# Altium PCB 7-Segment_v2_PCB.PcbDoc
Units mm, origin at the board's own origin, x right, y up, seen from the top; angles counter-clockwise.
Board outline 22.5 x 38.5 mm, 2 copper layers (Top Layer, Bottom Layer), stack 1.571 mm thick; 35 components, 42 nets, 106 pads, 21 vias.
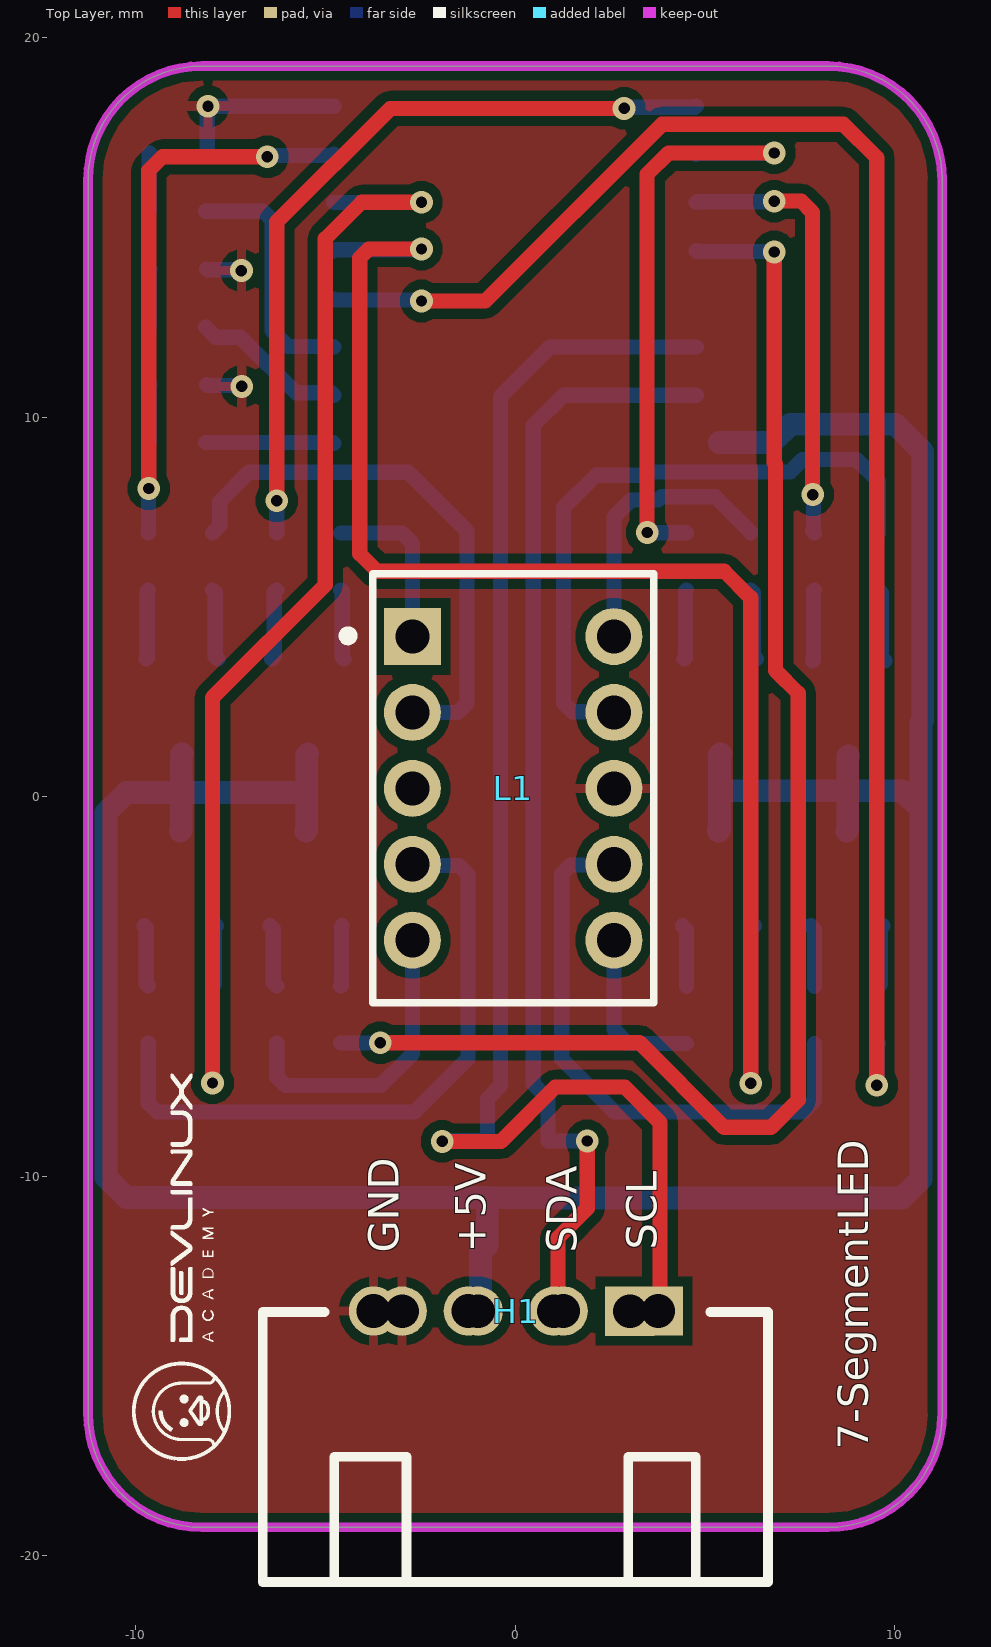
[diagram p0: Top Layer view]
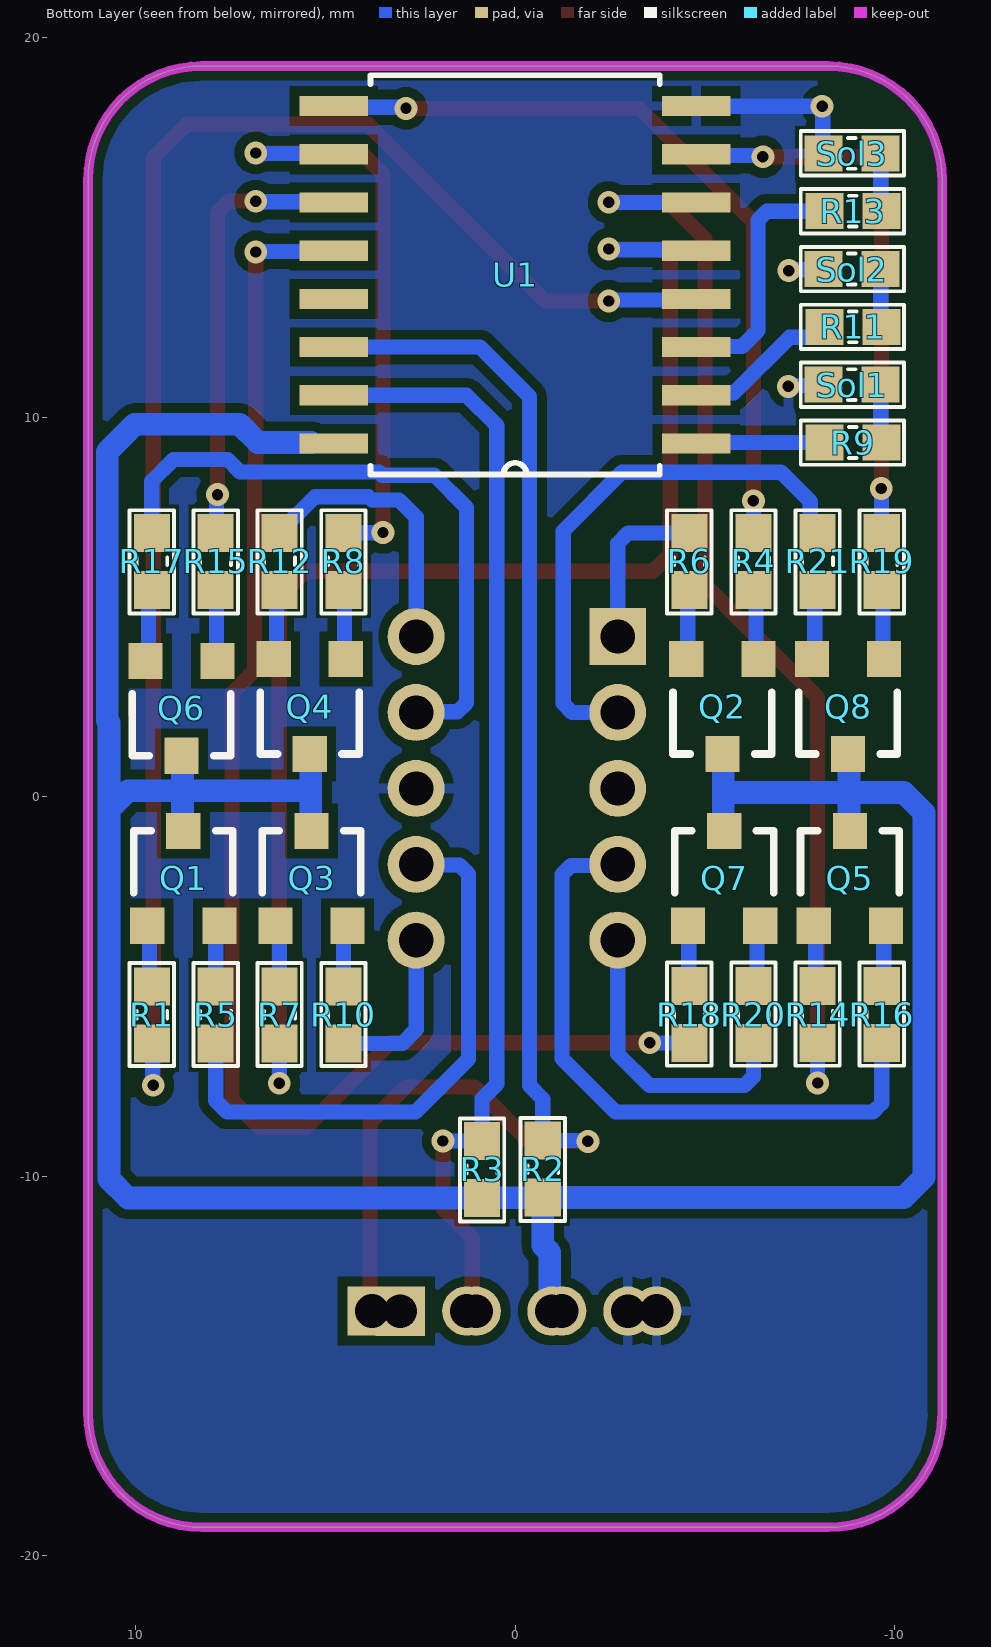
[diagram p1: Bottom Layer view, seen from below]
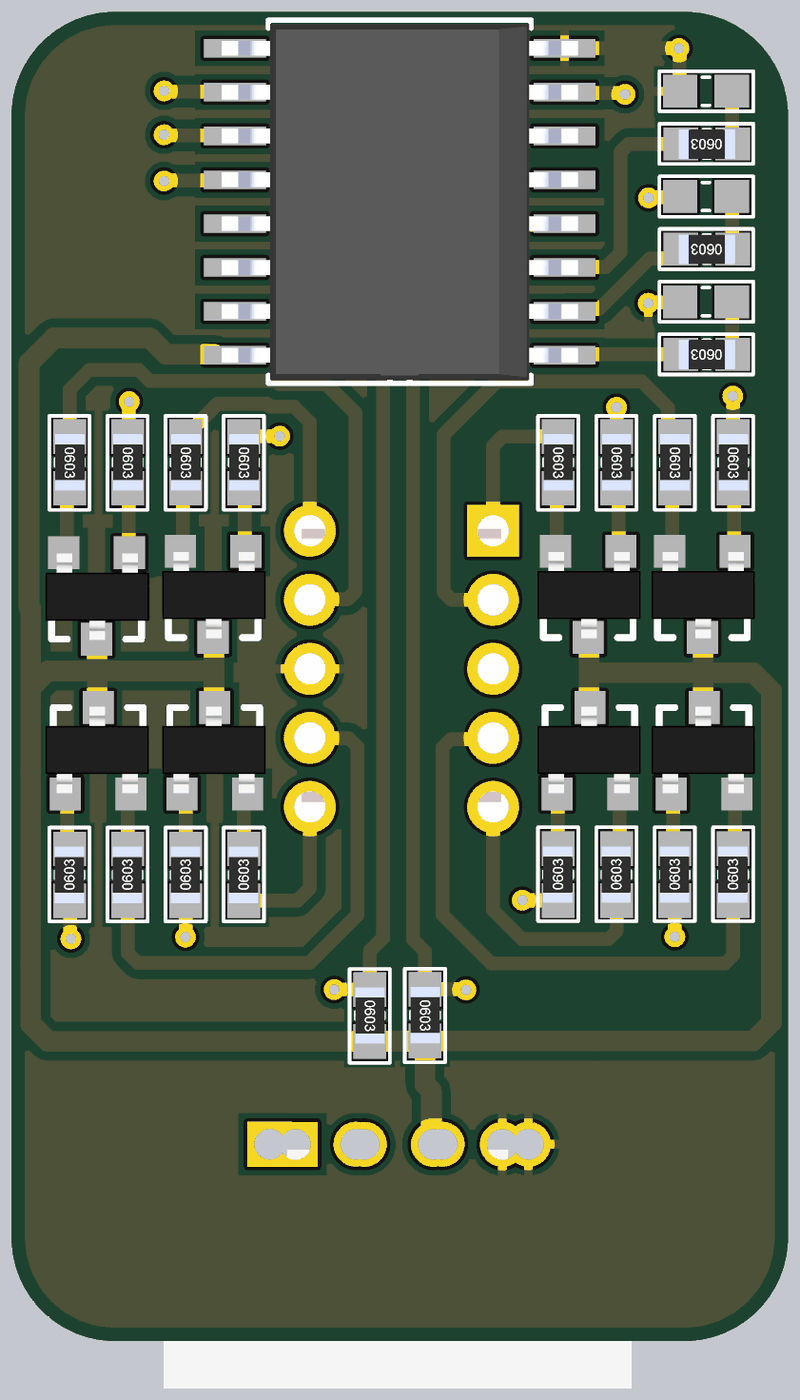
[diagram p2: 3D render of the assembled board from below, using the file's embedded part models]

## Layer stack, top to bottom
Top Solder: solder mask 0.0102, Solder Resist, Dk 3.5
Top Layer: signal copper 0.0356
Dielectric 1: dielectric 1.5, FR-4, Dk 4.8
Bottom Layer: signal copper 0.0356
Bottom Solder: solder mask 0.0102, Solder Resist, Dk 3.5

## Board outline
-11.25,-16.25 -11.25,16.25 cw(c-8.25,16.25) -8.25,19.25 8.25,19.25 cw(c8.25,16.25) 11.25,16.25 11.25,-16.25 cw(c8.25,-16.25) 8.25,-19.25 -8.25,-19.25 cw(c-8.25,-16.25)

## Design rules (kind name [scope] priority, off if disabled: settings)
Clearance [All] p1: gap=0.254 ignorepadtopadclearanceinfootprint=FALSE except(0: Arc-Hole Track-Hole SMDPad-Hole THPad-Hole Via-Hole Fill-Hole Poly-Hole Region-Hole Text-Hole)
PolygonConnect [All] p1: connectstyle=Relief reliefconductorwidth=0.254 reliefentries=4 polygonreliefangle="90 Angle" airgapwidth=0.254
RoomDefinition 7-Segment_v2_SCH [InComponentClass('7-Segment_v2_SCH')] p1: confinementstyle=ConfineIn formatcopy=TRUE lockcomponents=FALSE outline 77.183,-28.096 261.714,-28.096 261.714,-9.935 77.183,-9.935
RoutingVias [All] p1: holewidth=0.4 width=0.8 viastyle="Through Hole" minholewidth=0.3 minwidth=0.6 maxholewidth=0.5 maxwidth=1
SolderMaskExpansion [All] p1: expansion=0.102 istentingtop=FALSE
Width [All] p1: maxlimit=0.6 minlimit=0.254 preferedwidth=0.4
30 further rules are at their usual default settings.

## Components (designator, comment, footprint, x,y, rotation, side; value= is the part's Value field where it differs from the comment)
H1 "Header 4P 2.54 + 2.0 Duc Cong" "Header 4P DC 2.54 + 2.0" 3.745,-13.575 r270 top
L1 "LED 7 Thanh" "LED 7x1 0.28" -0.05,0.22 r0 top
Q1 "2N3906" SOT23 8.74,-2.15 r180 bottom
Q2 "2N3906" SOT23 -5.462,2.376 r0 bottom
Q3 "2N3906" SOT23 5.361,-2.15 r180 bottom
Q4 "2N3906" SOT23 5.409,2.376 r0 bottom
Q5 "2N3906" SOT23 -8.82,-2.15 r180 bottom
Q6 "2N3906" SOT23 8.788,2.33 r0 bottom
Q7 "2N3906" SOT23 -5.51,-2.15 r180 bottom
Q8 "2N3906" SOT23 -8.772,2.376 r0 bottom
R1 "10k" "tro smd 0603" 9.57,-5.748 r90 bottom
R2 "4.7k" "tro smd 0603" -0.73,-9.81 r270 bottom
R3 "4.7k" "tro smd 0603" 0.87,-9.82 r270 bottom
R4 "10k" "tro smd 0603" -6.28,6.2 r270 bottom
R5 "220R" "tro smd 0603" 7.887,-5.748 r90 bottom
R6 "220R" "tro smd 0603" -4.59,6.2 r270 bottom
R7 "10k" "tro smd 0603" 6.203,-5.748 r90 bottom
R8 "10k" "tro smd 0603" 4.52,6.2 r270 bottom
R9 "1k" "tro smd 0603" -8.899,9.33 r0 bottom
R10 "220R" "tro smd 0603" 4.52,-5.748 r90 bottom
R11 "1k" "tro smd 0603" -8.899,12.378 r0 bottom
R12 "220R" "tro smd 0603" 6.203,6.2 r270 bottom
R13 "1k" "tro smd 0603" -8.899,15.426 r0 bottom
R14 "10k" "tro smd 0603" -7.971,-5.74 r90 bottom
R15 "10k" "tro smd 0603" 7.887,6.2 r270 bottom
R16 "220R" "tro smd 0603" -9.661,-5.74 r90 bottom
R17 "220R" "tro smd 0603" 9.57,6.2 r270 bottom
R18 "10k" "tro smd 0603" -4.59,-5.74 r90 bottom
R19 "10k" "tro smd 0603" -9.661,6.2 r270 bottom
R20 "220R" "tro smd 0603" -6.28,-5.74 r90 bottom
R21 "220R" "tro smd 0603" -7.971,6.2 r270 bottom
Sol1 "0603" "Solder 0603" -8.874,10.854 r180 bottom
Sol2 "0603" "Solder 0603" -8.874,13.902 r180 bottom
Sol3 "0603" "Solder 0603" -8.874,16.95 r180 bottom
U1 "PCF8574AT" SOIC127P1032X265-16N 0,13.75 r0 bottom

## Footprints (in the part's own frame and the unit in brackets; to place one, negate y for a bottom-side part, rotate by r counter-clockwise, add the part's x,y. Pads: shape width x height; smd on the part's side, far side on the other; paste and mask are expansions set on the pad)
"Header 4P DC 2.54 + 2.0" [mm]
  rect 1.3x1.3 hole 0.889: 1(-0.025,0.025) 1(-0.022,-0.719)
  round 1.3 hole 0.889: 2(-0.025,-2.475) 2(-0.022,-2.719) 3(-0.025,-4.975) 3(-0.022,-4.719) 4(-0.025,-7.475) 4(-0.022,-6.718)
  silkscreen extent 0,-10.39 7.11,2.92, body extent 0.13,-10.48 7.06,3.11, height 7.38
"LED 7x1 0.28" [mm]
  rect 1.5x1.5 hole 0.9: 1(-2.655,4)
  round 1.5 hole 0.9: 2(-2.655,2) 3(-2.655,0) 4(-2.655,-2) 5(-2.655,-4) 6(2.655,-4) 7(2.655,-2) 8(2.655,0) 9(2.655,2) 10(2.655,4)
  silkscreen extent -4.47,-5.65 3.7,5.65, body extent -3.9,-4.95 3.9,5.15, height 8.04
SOIC127P1032X265-16N [mil]
  rect 71x21 smd: 1(-188,175) 2(-188,125) 3(-188,75) 4(-188,25) 5(-188,-25) 6(-188,-75) 7(-188,-125) 8(-188,-175) 9(188,-175) 10(188,-125) 11(188,-75) 12(188,-25) 13(188,25) 14(188,75) 15(188,125) 16(188,175)
  silkscreen extent -150,-207 150,207, body extent -203,-203 203,203, height 104
"Solder 0603" [mm] "Chip Capacitor, 2-Leads, Body 1,60x0,80mm, IPC Medium Density"
  rect 1x0.95 smd mask+0.076: 1(-0.75,0) 2(0.75,0)
  silkscreen extent -1.35,-0.58 1.37,0.58
SOT23 [mm] "SOT23"
  rect 0.9x0.95 smd: 1(-0.95,-1.25) 2(0,1.25)
  rect 0.9x0.95 smd mask+0: 3(0.95,-1.25)
  silkscreen extent -1.3,-0.38 1.3,1.25, body extent -1.52,-1.23 1.48,1.27, height 1.06
"tro smd 0603" [mm] "Chip Capacitor, 2-Leads, Body 1,60x0,80mm, IPC Medium Density"
  rect 1x0.95 smd mask+0.076: 1(-0.75,0) 2(0.75,0)
  silkscreen extent -1.35,-0.58 1.37,0.58, body extent -0.82,-0.42 0.82,0.43, height 0.44

## Part data
H1: "Cắm", Chung_Loai=Cắm, Don_Vi=Con, Ma_Hang=MH001310, Ten_Linh_Kien="Header 4P XH2.54-4P Đực Cong"
L1: library part "LED 7x1 0.28 Katot", "Dán", Chung_Loai=Dán, Don_Vi=Con, Ma_Hang=MH009707, Ten_Linh_Kien="Led 7 0.28 1 Số Katot Sáng Đỏ"
Q1 Q2 Q3 Q4 Q5 Q6 Q7 Q8: library part "Trans A1015 BA SMD", "PNP 600mW, ECB"
R1 R2 R3 R4 R7 R8 R14 R15 R18 R19: library part "Tro 0603 1% 10k", "Dán", Chung_Loai=Dán, Don_Vi=Con, Ma_Hang=MH006333, So_Chan=2, Ten_Linh_Kien="Trở 0603 1% 10k"
R5 R6 R10 R12 R16 R17 R20 R21: library part "Tro 0603 5% 220R", "Dán", Chung_Loai=Dán, Don_Vi=Con, Ma_Hang=MH006322, So_Chan=2, Ten_Linh_Kien="Trở 0603 5% 220R"
R9 R11 R13: library part "Tro 0603 1% 1k", "Dán", Chung_Loai=Dán, Don_Vi=Con, Ma_Hang=MH006334, So_Chan=2, Ten_Linh_Kien="Trở 0603 1% 1k"
Sol1 Sol2 Sol3: library part "Solder 0603", "Dán", Chung_Loai=Dán, Don_Vi=Con, So_Chan=2, Ten_Linh_Kien="Chân hàn 0603"
U1: "IÂ²C Bus IC Operating temperature: -40...+85 Â°C Power supply: 2.5...6 V Package: SO-16W", Package="SOIC-16 NXP Semiconductors", Check_prices=https://www.snapeda.com/parts/PCF8574AT/NXP+Semiconductors/view-part/?ref=eda, MF="NXP USA", MP=PCF8574AT, SnapEDA_Link=https://www.snapeda.com/parts/PCF8574AT/NXP+Semiconductors/view-part/?ref=snap

## Via types
v1: diameter 0.6, hole 0.3, Top Layer to Bottom Layer, 21 vias

## Nets (pads, with @x,y where several pads share a name; then routed paths per layer and width w, separated by ;. In a path a pad name is that pad's centre, name@x,y a point inside that pad or via, vN(x,y) a via of type N, cw(c..) or ccw(c..) an arc to the next point about the centre after c; other vN are vias at no path point)
+5: H1.3 Q1.2 Q2.2 Q3.2 Q4.2 Q5.2 Q6.2 Q7.2 Q8.2 R2.2 R3.2 U1.16 | length 78.8
  Bottom Layer w0.6: Q5.2 -8.796,-0.876 -8.796,0.113 ; Q8.2 -8.796,1.102 -8.796,0.113 ; Q7.2 -5.486,-0.876 -5.486,0.113 ; Q2.2 -5.486,1.102 -5.486,0.113 ; H1.3@-0.974,-13.553 -0.913,-13.493 -0.913,-12.003 -0.73,-11.82 R2.2 ; Q3.2 5.385,-0.876 5.385,0.113 ; U1.16@5.377,9.33 6.77,9.33 7.25,9.81 10.02,9.81 10.742,9.088 10.742,1.998 10.694,1.951 10.694,-0.335 ; Q4.2 5.385,1.102 5.385,0.113 ; Q1.2 8.764,-0.876 8.764,0.16 ; Q6.2 8.764,1.056 8.764,0.16 ; -8.796,0.113 -10.239,0.113 -10.774,-0.423 -10.774,-10.025 -10.239,-10.56 R2.2 ; -8.796,0.113 -5.486,0.113 ; R2.2 -0.725,-10.565 0.865,-10.565 R3.2 10.199,-10.57 10.694,-10.075 10.694,-0.335 ; 5.385,0.113 5.432,0.16 8.764,0.16 ; 8.764,0.16 10.199,0.16 10.694,-0.335
A: L1.7 R5.1 | length 15.2
  Bottom Layer w0.4: L1.7 2.586,-1.799 1.464,-1.799 1.23,-2.033 1.23,-6.91 2.624,-8.304 7.588,-8.304 7.887,-8.006 R5.1
B: L1.6 R10.1 | length 4.4
  Bottom Layer w0.4: L1.6 2.605,-6.135 2.968,-6.498 R10.1
C: L1.4 R16.1 | length 17.1
  Bottom Layer w0.4: R16.1 -9.661,-8.076 -9.427,-8.31 -2.65,-8.31 -1.24,-6.9 -1.24,-2.05 -1.474,-1.816 -2.669,-1.816 L1.4
D: L1.2 R21.1 | length 14.5
  Bottom Layer w0.4: R21.1 -7.779,7.142 -7.779,7.781 -7.01,8.55 -2.82,8.55 -1.27,7 -1.27,2.454 -1.504,2.22 L1.2
E: L1.1 R6.1 | length 4.5
  Bottom Layer w0.4: R6.1 -2.98,6.95 -2.705,6.675 L1.1
F: L1.10 R12.1 | length 7.4
  Bottom Layer w0.4: L1.10 2.605,7.365 3.056,7.816 3.769,7.816 3.857,7.904 5.274,7.904 6.203,6.975 R12.1
G: L1.9 R17.1 | length 17
  Bottom Layer w0.4: L1.9 2.586,2.239 1.514,2.239 1.28,2.473 1.28,7.62 2.13,8.47 3.498,8.47 3.586,8.558 7.248,8.558 7.57,8.88 9,8.88 9.57,8.31 R17.1
GND: H1.4 L1.8 Sol1.1 Sol2.1 Sol3.1 U1.8 | length 6.4
  Bottom Layer w0.4: Sol1.1 -8.102,10.832 -7.222,10.832 v1(-7.2,10.81) ; Sol2.1 -8.103,13.881 -7.231,13.881 v1(-7.21,13.86) ; Sol3.1 -8.107,16.967 -8.107,18.173 -8.087,18.192 -4.778,18.192 U1.8
  other v1: -8.09,18.19
H: L1.5 R20.1 | length 7.9
  Bottom Layer w0.4: R20.1 -6.28,-7.376 -6.046,-7.61 -3.54,-7.61 -2.705,-6.775 L1.5
NetQ1_1: Q1.1 R1.2 | length 1.6
  Bottom Layer w0.4: R1.2 9.63,-4.938 9.63,-3.46 Q1.1
NetQ1_3: Q1.3 R5.2 | length 1.6
  Bottom Layer w0.4: Q1.3 7.887,-3.497 R5.2
NetQ2_1: Q2.1 R4.2 | length 1.9
  Bottom Layer w0.4: Q2.1 -6.346,3.692 -6.346,5.384 R4.2
NetQ2_3: Q2.3 R6.2 | length 1.9
  Bottom Layer w0.4: R6.2 -4.551,5.411 -4.551,3.665 Q2.3
NetQ3_1: Q3.1 R7.2 | length 1.6
  Bottom Layer w0.4: R7.2 6.203,-3.508 Q3.1
NetQ3_3: Q3.3 R10.2 | length 1.6
  Bottom Layer w0.4: Q3.3 4.52,-3.509 R10.2
NetQ4_1: Q4.1 R8.2 | length 1.8
  Bottom Layer w0.4: Q4.1 4.49,3.656 4.49,5.419 R8.2
NetQ4_3: Q4.3 R12.2 | length 1.9
  Bottom Layer w0.4: R12.2 6.281,5.372 6.281,3.704 Q4.3
NetQ5_1: Q5.1 R14.2 | length 1.6
  Bottom Layer w0.4: R14.2 -7.92,-4.94 -7.92,-3.45 Q5.1
NetQ5_3: Q5.3 R16.2 | length 1.6
  Bottom Layer w0.4: Q5.3 -9.716,-3.454 -9.716,-4.936 R16.2
NetQ6_1: Q6.1 R15.2 | length 1.9
  Bottom Layer w0.4: Q6.1 7.862,3.604 7.862,5.426 R15.2
NetQ6_3: Q6.3 R17.2 | length 1.9
  Bottom Layer w0.4: R17.2 9.654,5.366 9.654,3.664 Q6.3
NetQ7_1: Q7.1 R18.2 | length 1.6
  Bottom Layer w0.4: R18.2 -4.575,-4.975 -4.575,-3.415 Q7.1
NetQ7_3: Q7.3 R20.2 | length 1.7
  Bottom Layer w0.4: Q7.3 -6.37,-3.49 -6.37,-4.9 R20.2
NetQ8_1: Q8.1 R19.2 | length 1.8
  Bottom Layer w0.4: Q8.1 -9.692,3.656 -9.692,5.419 R19.2
NetQ8_3: Q8.3 R21.2 | length 1.9
  Bottom Layer w0.4: R21.2 -7.896,5.376 -7.896,3.7 Q8.3
NetR9_1: R9.1 Sol1.2 | length 1.5
  Bottom Layer w0.4: R9.1 -9.636,9.343 -9.636,10.841 Sol1.2
NetR9_2: R9.2 U1.1 | length 3.4
  Bottom Layer w0.4: R9.2 -8.147,9.328 -4.798,9.328 U1.1
NetR11_1: R11.1 Sol2.2 | length 1.5
  Bottom Layer w0.4: R11.1 -9.636,12.391 -9.636,13.889 Sol2.2
NetR11_2: R11.2 U1.2 | length 4.1
  Bottom Layer w0.4: R11.2 -7.874,12.103 -7.233,12.103 -5.772,10.642 -4.842,10.642 U1.2
NetR13_1: R13.1 Sol3.2 | length 1.5
  Bottom Layer w0.4: R13.1 -9.636,15.439 -9.636,16.937 Sol3.2
NetR13_2: R13.2 U1.3 | length 6.6
  Bottom Layer w0.4: R13.2 -6.634,15.426 -6.4,15.192 -6.4,12.28 -5.979,11.859 -4.789,11.859 U1.3
P0: R1.1 U1.4 | length 42.2
  Top Layer w0.4: v1(-2.466,13.06) -0.785,13.06 3.869,17.714 8.652,17.714 9.53,16.836 v1(9.53,-7.6)
  Bottom Layer w0.4: U1.4 -4.748,13.087 -2.494,13.087 v1(-2.466,13.06) ; v1(9.53,-7.6) 9.55,-7.58 9.55,-6.518 R1.1
P1: R7.1 U1.5 | length 36.6
  Top Layer w0.4: v1@-2.4,14.43 -3.856,14.43 -4.09,14.196 -4.09,6.4 -3.63,5.94 5.51,5.94 6.21,5.24 v1(6.21,-7.55)
  Bottom Layer w0.4: U1.5 -4.753,14.407 -2.422,14.407 v1@-2.4,14.43 ; R7.1 6.207,-6.502 6.207,-7.547 v1(6.21,-7.55)
  other v1: -2.466,14.43
P2: R14.1 U1.6 | length 29.8
  Top Layer w0.4: v1(-7.971,-7.541) -7.971,2.609 -5,5.58 -5,14.7 -4.04,15.66 v1@-2.437,15.66
  Bottom Layer w0.4: v1(-7.971,-7.541) R14.1 ; U1.6 -4.773,15.657 -2.44,15.657 v1@-2.437,15.66
  other v1: -2.466,15.66
P3: R19.1 U1.7 | length 14.6
  Top Layer w0.4: v1(-9.65,8.12) -9.65,16.5 -9.29,16.86 v1(-6.53,16.86)
  Bottom Layer w0.4: R19.1 -9.656,6.956 -9.656,8.114 v1(-9.65,8.12) ; v1(-6.53,16.86) -6.498,16.892 -4.808,16.892 U1.7
P4: R4.1 U1.9 | length 20.5
  Top Layer w0.4: v1(-6.28,7.796) -6.28,15.14 -3.286,18.134 v1(2.874,18.134)
  Bottom Layer w0.4: R4.1 v1@-6.28,7.796 ; v1(2.874,18.134) 2.904,18.164 4.745,18.164 U1.9
P5: R8.1 U1.10 | length 16.3
  Top Layer w0.4: v1(3.48,6.96) 3.48,16.4 4.04,16.96 v1@6.89,16.96
  Bottom Layer w0.4: v1(3.48,6.96) 3.485,6.955 4.515,6.955 R8.1 ; U1.10 4.793,16.942 6.872,16.942 v1@6.89,16.96
  other v1: 6.83,16.96
P6: R15.1 U1.11 | length 11.6
  Top Layer w0.4: v1@6.95,15.69 7.54,15.69 7.84,15.39 v1(7.84,7.96)
  Bottom Layer w0.4: U1.11 4.793,15.672 v1@6.83,15.672 ; v1(7.84,7.96) 7.863,7.937 7.863,7.02 7.84,6.997 R15.1
  other v1: 6.83,15.69
P7: R18.1 U1.12 | length 37.9
  Top Layer w0.4: v1(-3.55,-6.48) 3.275,-6.48 5.505,-8.71 6.74,-8.71 7.46,-7.99 7.46,2.727 6.864,3.323 6.864,8.773 6.83,8.807 v1(6.83,14.35)
  Bottom Layer w0.4: R18.1 -4.585,-6.485 -3.555,-6.485 v1(-3.55,-6.48) ; U1.12 4.793,14.367 6.812,14.367 v1(6.83,14.35)
SCL: H1.1 R2.1 U1.14 | length 38.3
  Top Layer w0.4: v1(-1.92,-9.08) -0.37,-9.08 1.06,-7.65 2.89,-7.65 3.82,-8.58 3.82,-13.5 H1.1@3.77,-13.55
  Bottom Layer w0.4: v1(-1.92,-9.08) -1.9,-9.06 R2.1 -0.73,-7.96 -0.38,-7.61 -0.38,10.54 0.925,11.845 U1.14
SDA: H1.2 R3.1 U1.15 | length 29.5
  Top Layer w0.4: H1.2@1.27,-13.55 1.13,-13.41 1.13,-11.62 1.9,-10.85 v1(1.9,-9.07)
  Bottom Layer w0.4: v1(1.9,-9.07) R3.1 0.87,-7.96 0.48,-7.57 0.48,9.78 1.275,10.575 U1.15
pads on no net: L1.3 U1.13

## Polygon pours and split planes (outlines as drawn)
GND on Bottom Layer "NONET_L-01_P-001" (solid, remove dead copper, pour order 0): -11.25,19.25 11.25,19.25 11.25,-19.25 -11.25,-19.25
GND on Top Layer "NONET_L-01_P-001" (solid, remove dead copper, pour order 1): -11.25,-19.25 11.25,-19.25 11.25,19.25 -11.25,19.25

## Keep-outs
Keep-Out Layer:
  the board outline again, w0.254

## Silkscreen, mask and mechanical layers (free items; w line width, h text height)
Top Overlay:
  drawing of 21 lines, arcs and shapes, not listed
  text "SCL" at 3.73,-11.94 h0.8 r90
  text "GND" at -3.07,-12.02 h0.8 r90
  text "+5V" at -0.767,-12.02 h0.8 r90
  text "SDA" at 1.62,-12.01 h0.8 r90
  text "7-SegmentLED" at 9.303,-17.21 h0.8 r90